# Altium PCB Shining Pig.PcbDoc (part 3 of 3)
Units mm, origin at the board's own origin, x right, y up, seen from the top; angles counter-clockwise.
Board outline 59.05 x 78.83 mm, 2 copper layers (Top Layer, Bottom Layer); 69 components, 43 nets, 179 pads, 208 vias.
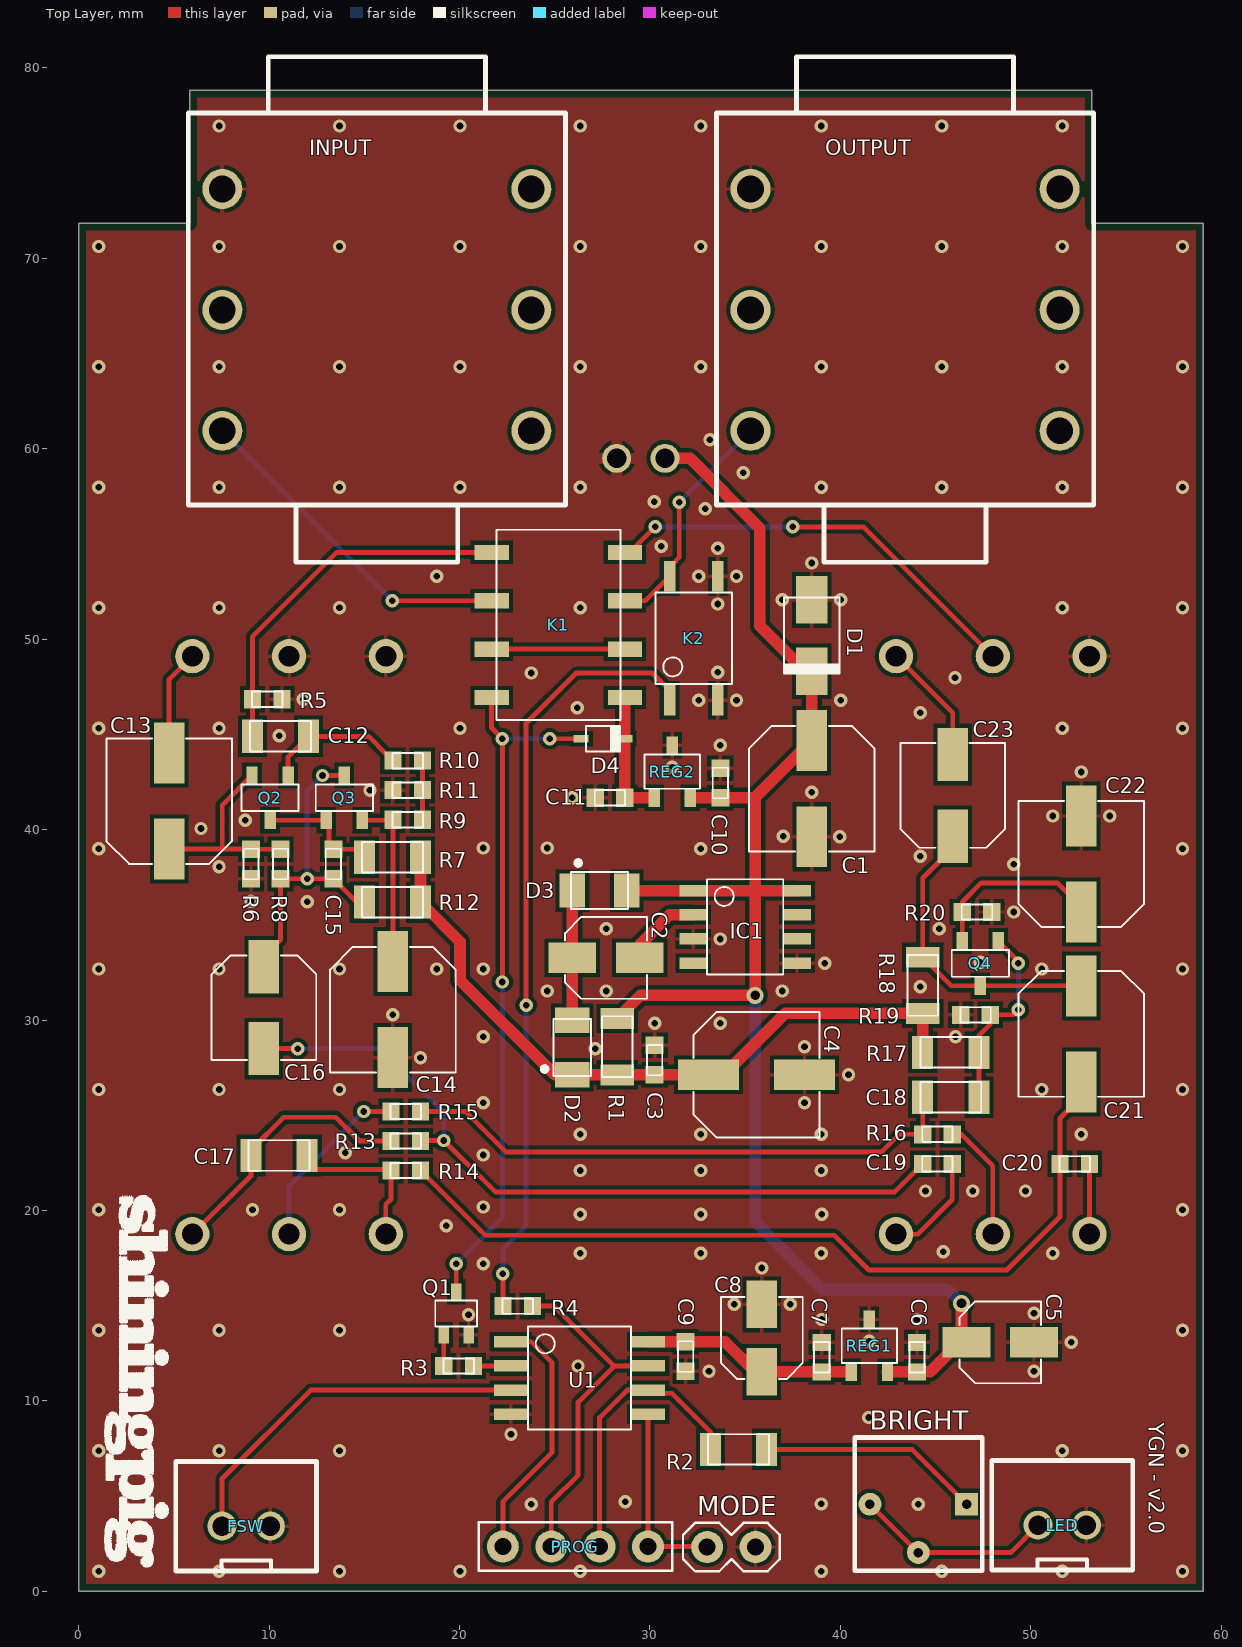
[diagram p0: Top Layer view]

## Part data (continued)
U1: library part ATTINY85-20SU, "IC, 8BIT MCU, AVR TINY, 20MHZ, 8-SOIC", Case/Package=SOIC, Frequency=20MHz, Manufacturer="Microchip / Atmel", Max Operating Temperature=85°C, Max Supply Voltage=5.5V, Min Operating Temperature=-40°C, Min Supply Voltage=2.7V, Package Quantity=95, Supplier Part Number 1=1455164, Access Time=20us, ComponentLink1Description=https://datasheet.ciiva.com/1167/1698186-1167152.pdf?src-supplier=Newark, ComponentLink1URL=https://datasheet.ciiva.com/1167/1698186-1167152.pdf?src-supplier=Newark, ComponentLink2Description=https://datasheet.ciiva.com/15122/getdatasheetpartid-131914-15122511.pdf?src-supplier=Verical, ComponentLink2URL=https://datasheet.ciiva.com/15122/getdatasheetpartid-131914-15122511.pdf?src-supplier=Verical, ComponentLink3Description=https://datasheet.ciiva.com/26207/doc2586-26207573.pdf?src-supplier=Avnet+Europe, ComponentLink3URL=https://datasheet.ciiva.com/26207/doc2586-26207573.pdf?src-supplier=Avnet+Europe, ComponentLink4Description=https://datasheet.ciiva.com/28653/1698186-28653829.pdf?src-supplier=Element14, ComponentLink4URL=https://datasheet.ciiva.com/28653/1698186-28653829.pdf?src-supplier=Element14, ComponentLink5Description=https://datasheet.ciiva.com/3203/doc2586-3203150.pdf?src-supplier=Avnet, ComponentLink5URL=https://datasheet.ciiva.com/3203/doc2586-3203150.pdf?src-supplier=Avnet, Contact Plating=Tin, Core Architecture=AVR, Data Bus Width=8b, Density=8KB, Height=1.91mm, Interface=SPI, Lead Free="Lead Free", Length=5.35mm, Manufacturer Part Number=ATTINY85-20SU, Max Frequency=20MHz, Memory Size=8KB, Memory Type=FLASH, Mount="Surface Mount", Number of ADC Channels=4, Number of I2C Channels=1, Number of I/Os=6, Number of Pins=8, Number of Programmable I/O=6, Number of PWM Channels=6, Number of SPI Channels=1, Number of Timers/Counters=2, Number of UART Channels=1, Oscillator Type=Internal, Packaging=Rail/Tube, Peripherals="Brown-out Detect/Reset", Price=0.98, Pricing="1=0.972, 25=0.925, 100=0.894, 1000=0.862 (EUR)", Radiation Hardening=No, RAM Size=512B, REACH SVHC="No SVHC", RoHS=Yes, Stock=2172, Supplier 1=Farnell, Termination=SMD/SMT, Watchdog Timer=Yes, Width=5.4mm
VOL: library part POT_100kA_ALPHA_16mm, "100k Log potentiometer round shaft", Package="PCB Mounted", Dimensions=16mm, Price=0.5

## Via types
v1: diameter 0.7, hole 0.35, Top Layer to Bottom Layer, tented both sides, 149 vias
v2: diameter 0.7, hole 0.35, Top Layer to Bottom Layer, 57 vias
v3: diameter 0.889, hole 0.508, Top Layer to Bottom Layer, 2 vias

## Nets (pads, with @x,y where several pads share a name; then routed paths per layer and width w, separated by ;. In a path a pad name is that pad's centre, name@x,y a point inside that pad or via, vN(x,y) a via of type N, cw(c..) or ccw(c..) an arc to the next point about the centre after c; other vN are vias at no path point)
+9V: C1.+ C5.+ C6.1 C10.1 D1.1 D3.2 DC.1 IC1.1 IC1.8 R1.1 REG1.2 REG2.2 | length 84.7
  Top Layer w0.61: R1.1 29.506,31.3 v3(35.525,31.3) 35.525,36.8 ; D3.2 IC1.1 35.525,36.8 ; DC.1 32.111,59.5 35.775,55.836 35.775,50.7 38.156,48.319 D1.1 C1.+ 35.525,41.696 ; REG2.2 C10.1 35.504,41.675 35.525,41.696 ; IC1.8 35.525,36.8 ; REG1.2 C6.1 44.728,11.525 C5.+@46.278,13.075 ; C5.+@46.362,13.075 v3(46.362,15.125) ; 35.525,36.8 35.525,41.696
  Bottom Layer w0.61: v3(35.525,31.3) 35.525,19.4 39.075,15.85 45.637,15.85 v3(46.362,15.125)
GND: C1.- C3.2 C4.- C5.- C6.2 C7.2 C8.- C9.2 C10.2 C11.2 C14.- C22.- D1.2 DC.2 FSW.2 GAIN.1 GAIN.2 IC1.3 IC1.5 INPUT.S K2.3 K2.4 LED.2 MODE.1 OUTPUT.S Q1.2 R5.1 R6.1 R11.1 R19.1 R20.1 REG1.3 REG2.3 U1.4 VOL.1
  other v1: 23.77,4.575 38.996,4.59 44.094,4.575 28.698,4.703 7.373,7.381 13.698,7.381 51.645,7.381 22.7,8.25 41.5,9.125 33.105,11.555 50.169,11.555 26.225,11.835 52.125,13.075 41.525,13.125 7.373,13.705 13.698,13.705 39.025,14.275 44.028,14.275 20.475,14.525 50.169,14.6 34.425,15.069 37.375,15.069 35.875,16.975 21.25,17.2 26.347,17.75 32.671,17.75 38.996,17.75 51.15,17.75 45.4,17.825 19.3,19.2 26.347,19.8 32.671,19.8 39.025,19.8 9.125,20.03 13.698,20.03 21.25,20.18 44.475,21.025 46.95,21.025 49.725,21.025 26.347,22.1 32.671,22.1 38.996,22.1 21.25,22.912 14,23.037 26.347,24 32.671,24 38.996,24 52.65,24 21.25,25.65 38.118,25.65 7.373,26.355 13.698,26.355 50.582,26.355 40.425,27.125 17.95,28.025 27.125,28.5 38.118,28.6 21.25,29.125 46.05,29.125 30.245,29.836 33.7,29.836 16.5,30.275 24.6,31.525 27.7,31.525 36.95,31.525 44.2,31.75 7.373,32.679 13.698,32.679 18.8,32.679 21.25,32.679 50.582,32.679 39.175,32.99 47.35,33.042 33.695,34.26 27.7,34.8 45.2,34.8 49.1,35.677 11.997,36.211 9.05,36.247 7.373,38.05 49.1,38.175 44.2,38.6 32.671,39.004 21.25,39.036 24.6,39.036 39.975,39.629 37,39.653 6.425,40.065 8.75,40.49 51.15,40.719 54.15,40.719 25.928,41.677 38.5,41.972 15.3,42.072 52.65,43.025 31.175,43.275 33.7,44.425 10.525,44.94 7.373,45.328 20.022,45.328 51.645,45.328 44.2,46.133 26.175,46.4 32.571,46.8 34.55,46.8 40.025,46.8 11.8,46.85 46.025,47.975 23.772,48.225 33.57,48.269 7.373,51.653 13.698,51.653 26.347,51.653 51.645,51.653 33.57,51.853 36.95,52.069 40.025,52.069 18.8,53.3 32.571,53.3 34.55,53.3 38.5,54 33.57,54.775 30.6,54.875 32.9,56.85 30.225,57.213 7.373,57.978 13.698,57.978 20.022,57.978 26.347,57.978 38.996,57.978 45.321,57.978 51.645,57.978 34.9,58.75 33.15,60.475 7.373,64.302 13.698,64.302 20.022,64.302 26.347,64.302 32.671,64.302 38.996,64.302 45.321,64.302 51.645,64.302 13.698,70.627 20.022,70.627 26.347,70.627 32.671,70.627 38.996,70.627 45.321,70.627
  other v2: 1.048,1.056 7.373,1.056 13.698,1.056 20.022,1.056 26.347,1.056 38.996,1.056 45.321,1.056 51.645,1.056 57.97,1.056 1.048,7.381 57.97,7.381 1.048,13.705 57.97,13.705 1.048,20.03 57.97,20.03 1.048,26.355 57.97,26.355 1.048,32.679 57.97,32.679 1.048,39.004 57.97,39.004 1.048,45.328 57.97,45.328 1.048,51.653 57.97,51.653 1.048,57.978 57.97,57.978 1.048,64.302 57.97,64.302 1.048,70.627 7.373,70.627 51.645,70.627 57.97,70.627 7.373,76.951 13.698,76.951 20.022,76.951 26.347,76.951 32.671,76.951 38.996,76.951 45.321,76.951 51.645,76.951
INPUT: INPUT.T K1.6 | length 17.8
  Top Layer w0.254: v1(16.465,52.02) K1.6
  Bottom Layer w0.254: INPUT.T v1(16.465,52.02)
NetBASS_1: BASS.1 C17.1 R14.1 | length 8.3
  Top Layer w0.254: C17.1 12,22.6 12.45,22.15 R14.1@16.4,22.15 ; BASS.1 16.129,20.329 16.4,20.6 R14.1
NetBASS_2: BASS.2 R15.2 | length 9.5
  Top Layer w0.254: v2(14.975,25.2) R15.2
  Bottom Layer w0.254: BASS.2 11.049,21.274 v2(14.975,25.2)
NetBASS_3: BASS.3 C17.2 R13.2 | length 14.3
  Top Layer w0.254: BASS.3 9.05,21.835 C17.2 9.05,23.175 10.775,24.9 13.499,24.9 14.749,23.65 R13.2
NetBRIGHT_1: BRIGHT.1 R2.2 | length 11.7
  Top Layer w0.254: R2.2 43.759,7.45 BRIGHT.1
NetBRIGHT_2: BRIGHT.2 BRIGHT.3 LED.1 | length 10.5
  Top Layer w0.254: BRIGHT.3 BRIGHT.2 48.942,2.035 LED.1
NetC2_+: C2.+ D2.2 D3.1 | length 6.8
  Top Layer w0.61: D2.2 C2.+ 25.928,33.279 D3.1
NetC2_-: C2.- IC1.2 | length 4.2
  Top Layer w0.61: C2.- 29.463,33.963 31.03,35.53 IC1.2
NetC7_1: C7.1 C8.+ C9.1 REG1.1 U1.8 | length 11.3
  Top Layer w0.61: U1.8 C9.1 33.945,13.105 35.525,11.525 C8.+ C7.1 REG1.1
NetC11_1: C11.1 D4.1 K1.1 REG2.1 | length 6.8
  Top Layer w0.61: K1.1 D4.1 28.675,44.764 C11.1 28.677,41.675 REG2.1
NetC12_1: C12.1 Q2.1 R10.1 | length 7.5
  Top Layer w0.254: Q2.1 11,43.825 C12.1 15.222,44.9 16.152,43.97 16.177,43.97 16.5,43.647 R10.1
NetC13_+: C13.+ Q2.2 R6.2 R8.1 | length 10.4
  Top Layer w0.254: C13.+ 7.542,38.975 ; Q2.2 7.542,41.289 7.542,38.975 ; R8.1 R6.2 9.025,38.972 9.021,38.975 7.542,38.975
NetC13_-: C13.- GAIN.3 | length 5.6
  Top Layer w0.254: C13.- 4.75,47.888 GAIN.3
NetC14_+: C14.+ Q3.2 R9.2 | length 9
  Top Layer w0.254: Q3.2 R9.2@16.475,40.497 ; C14.+ R9.2
NetC15_1: C15.1 C16.+ Q3.3 R8.2 R12.1 | length 16.8
  Top Layer w0.254: C16.+ 9.725,33.397 10.398,34.07 10.451,34.07 10.6,34.219 R8.2 v2(11.997,37.422) C15.1 14.6,36.197 R12.1 ; v2(12.803,42.847) Q3.3
  Bottom Layer w0.254: v2(11.997,37.422) 11.997,42.04 v2(12.803,42.847)
NetC15_2: C15.2 Q2.3 Q3.1 R7.1 | length 6.4
  Top Layer w0.254: Q2.3 Q3.1 13.149,40.348 13.149,39.173 13.35,38.972 C15.2 14.577,38.972 15,38.549 R7.1
NetC16_-: C16.- C19.2 R13.1 | length 40.4
  Top Layer w0.254: C16.- 9.728,28.5 v2(11.5,28.5) ; R13.1 17.975,23.675 v2(19.175,23.675) 21.875,20.975 42.85,20.975 43.977,22.102 44.002,22.102 44.325,22.425 C19.2
  Bottom Layer w0.254: v2(11.5,28.5) 15.805,28.5 19.175,25.13 v2(19.175,23.675)
NetC18_1: C18.1 Q4.1 R17.1 R19.2 | length 10.2
  Top Layer w0.254: C18.1 R17.1 47.275,29.175 47.875,29.775 R19.2 49.1,30.275 v2@49.375,30.55 ; Q4.1 49.35,33.1 v2(49.35,32.992)
  Bottom Layer w0.254: v2(49.35,32.992) 49.35,30.575 v2@49.375,30.55
  other v2: 49.35,30.55
NetC18_2: C18.2 R15.1 R16.2 | length 29.6
  Top Layer w0.254: R15.1 20.3,25.2 22.425,23.075 42.175,23.075 43.1,24 R16.2 C18.2
NetC19_1: C19.1 TREBLE.3 | length 5.6
  Top Layer w0.254: TREBLE.3 44.054,18.754 45.875,20.575 C19.1
NetC20_1: C20.1 C21.- R14.2 | length 44.5
  Top Layer w0.254: R14.2 17.95,22.075 18.273,21.752 18.298,21.752 21.35,18.7 39.675,18.7 41.5,16.875 48.75,16.875 51.536,19.661 C20.1 51.536,24.836 52.65,25.95 C21.-
NetC20_2: C20.2 TREBLE.1 | length 3.7
  Top Layer w0.254: TREBLE.1 C20.2
NetC21_+: C21.+ C23.+ Q4.3 R18.1 | length 16
  Top Layer w0.254: C23.+ 45.9,39.036 44.325,37.461 R18.1 45.825,31.8 Q4.3 52.646,31.8 C21.+
NetC22_+: C22.+ Q4.2 R20.2 | length 9.5
  Top Layer w0.254: Q4.2 R20.2 R20.2 46.402,36.202 47.4,37.2 51.4,37.2 52.65,35.95 C22.+
NetC23_-: C23.- VOL.3 | length 6.5
  Top Layer w0.254: VOL.3@42.926,49.021 VOL.3 45.9,46.133 C23.-
NetD4_2: D4.2 K1.8 Q1.3 | length 36.5
  Top Layer w0.254: Q1.3@19.825,15.775 v2(19.825,17.2) ; K1.8 21.686,45.339 v2(22.25,44.775) v2(22.25,32) ; v2(24.735,44.775) D4.2
  Bottom Layer w0.254: v2(19.825,17.2) 22.25,19.625 v2(22.25,32) ; v2(22.25,44.775) v2(24.735,44.775)
NetK1_2: K1.2 K1.7 | length 7
  Top Layer w0.254: K1.7 K1.2
NetK2_1: K2.1 R4.2 | length 40.6
  Top Layer w0.254: R4.2 22.278,14.978 22.275,14.98 v2(22.275,16.674) ; v2(23.5,30.775) 23.5,45.6 26.125,48.225 30.125,48.225 31.03,47.32 K2.1
  Bottom Layer w0.254: v2(22.275,16.674) 22.275,17.975 23.5,19.2 v2(23.5,30.775)
NetQ1_1: Q1.1 R3.2 | length 1.7
  Top Layer w0.254: R3.2@19.175,11.86 R3.2 Q1.1
NetR9_1: R9.1 R10.2 R11.2 | length 3.1
  Top Layer w0.254: R9.1 R11.2 R10.2
NetR16_1: R16.1 TREBLE.2 | length 6.4
  Top Layer w0.254: R16.1 46.35,24 48.006,22.344 TREBLE.2
OUTPUT: K1.3 K2.6 OUTPUT.T | length 12.3
  Top Layer w0.254: K1.3 29.75,52.02 K2.6 31.03,53.8 31.203,53.973 31.213,53.973 31.538,54.298 v2(31.538,57.198)
  Bottom Layer w0.254: v2(31.538,57.198) OUTPUT.T
PB0: MODE.2 PROG.4 U1.5 | length 10.1
  Top Layer w0.254: U1.5@29.898,9.293 U1.5 29.9,2.352 PROG.4 32.98,2.35 MODE.2
PB1: PROG.3 R2.1 U1.6 | length 14.2
  Top Layer w0.254: PROG.3 27.358,9.125 28.798,10.565 U1.6 30.06,10.405 31.145,10.405 33.175,8.375 R2.1@33.175,8.25
PB2: PROG.2 R4.1 U1.7 | length 18.2
  Top Layer w0.254: R4.1 24.975,14.975 28.121,11.829 ; PROG.2 24.818,4.693 26.225,6.1 26.225,9.934 28.121,11.829 ; U1.7 28.126,11.835 28.121,11.829
PB3: R3.1 U1.2 | length 2
  Top Layer w0.254: R3.1 U1.2
PB4: FSW.1 U1.3 | length 19.6
  Top Layer w0.254: FSW.1 7.525,5.9 12.19,10.565 U1.3
PB5: PROG.1 U1.1 | length 13.3
  Top Layer w0.254: PROG.1 22.278,4.703 24.85,7.275 24.85,12.025 23.77,13.105 U1.1
RETURN: K1.4 VOL.2 | length 22.7
  Top Layer w0.254: K1.4 28.935,54.56 v2(30.275,55.9) ; v2(37.495,55.9) 41.213,55.9 VOL.2
  Bottom Layer w0.254: v2(30.275,55.9) v2(37.495,55.9)
SEND: C12.2 K1.5 R5.2 | length 19.6
  Top Layer w0.254: C12.2 R5.2 9.125,50.125 13.56,54.56 K1.5
Vr: C3.1 C4.+ D2.1 R1.2 R7.2 R12.2 R17.2 R18.2 | length 37.1
  Top Layer w0.61: R7.2 R12.2 20.025,34.122 20.025,32.1 24.999,27.126 D2.1 R1.2 C3.1 ; C3.1 C4.+ 33.875,27.125 37.1,30.35 R18.2 R17.2
pads on no net: IC1.4 IC1.6 IC1.7 INPUT.R INPUT.RN INPUT.SN INPUT.TN OUTPUT.R OUTPUT.RN OUTPUT.SN OUTPUT.TN

## Polygon pours and split planes (outlines as drawn)
GND on Top Layer "GND_L01_P010" (solid, pour order 10): 0,0 59.055,0 59.055,71.84 53.213,71.84 53.213,78.825 5.842,78.825 5.842,71.84 0,71.84
GND on Bottom Layer "GND_L02_P008" (solid, pour order 8): 0,0 59.055,0 59.055,71.713 59.182,71.84 53.213,71.84 53.213,78.825 5.842,78.825 5.842,71.84 0,71.84

## Keep-outs
Keep-Out Layer:
  lines w0.025: 0,0 8.668,0 38.195,0 43.41,0 46.018,0 51.233,0 53.84,0 59.055,0 59.055,71.84 53.213,71.84 53.213,78.825 5.842,78.825 5.842,71.84 0,71.84 0,0

## Silkscreen, mask and mechanical layers (free items; w line width, h text height)
Top Overlay:
  drawing of 4 lines, arcs and shapes, not listed
  text "YGN - v2.0" at 56.2,8.855 h0.8 r270
Mechanical 3:
  lines w2: -1,7.375 -1,0 ; -1,13.699 -1,57.972 ; -1,64.296 -1,71.84 ; 60.055,7.37 60.055,0 ; 60.055,13.699 60.055,57.972 ; 60.055,64.301 60.055,71.84 ; -1,0 ccw(c0,0) 0,-1 ; -1,0 ccw(c0,0) 0,-1 ; -1,71.84 cw(c0,71.84) 0,72.84 ; -1,71.84 cw(c0,71.84) 0,72.84 ; 0,-1 59.055,-1 ; 0,72.84 4.842,72.84 4.842,78.825 ; 4.842,78.825 cw(c5.842,78.825) 5.842,79.825 ; 4.842,78.825 cw(c5.842,78.825) 5.842,79.825 ; 5.842,79.825 53.213,79.825 ; 53.213,79.825 cw(c53.213,78.825) 54.213,78.825 ; 53.213,79.825 cw(c53.213,78.825) 54.213,78.825 ; 54.213,78.825 54.213,72.84 59.055,72.84 ; 59.055,-1 ccw(c59.055,0) 60.055,0 ; 59.055,-1 ccw(c59.055,0) 60.055,0 ; 59.055,72.84 cw(c59.055,71.84) 60.055,71.84 ; 59.055,72.84 cw(c59.055,71.84) 60.055,71.84
Route Tool Path:
  lines w2: -1,7.375 -1,0 ; -1,13.699 -1,57.972 ; -1,64.296 -1,71.84 ; 60.055,7.37 60.055,0 ; 60.055,13.699 60.055,57.972 ; 60.055,64.301 60.055,71.84 ; -1,0 ccw(c0,0) 0,-1 ; -1,0 ccw(c0,0) 0,-1 ; -1,71.84 cw(c0,71.84) 0,72.84 ; -1,71.84 cw(c0,71.84) 0,72.84 ; 0,-1 59.055,-1 ; 0,72.84 4.842,72.84 4.842,78.825 ; 4.842,78.825 cw(c5.842,78.825) 5.842,79.825 ; 4.842,78.825 cw(c5.842,78.825) 5.842,79.825 ; 5.842,79.825 53.213,79.825 ; 53.213,79.825 cw(c53.213,78.825) 54.213,78.825 ; 53.213,79.825 cw(c53.213,78.825) 54.213,78.825 ; 54.213,78.825 54.213,72.84 59.055,72.84 ; 59.055,-1 ccw(c59.055,0) 60.055,0 ; 59.055,-1 ccw(c59.055,0) 60.055,0 ; 59.055,72.84 cw(c59.055,71.84) 60.055,71.84 ; 59.055,72.84 cw(c59.055,71.84) 60.055,71.84